# Altium PCB vaja2.PcbDoc
Units mm, origin at the board's own origin, x right, y up, seen from the top; angles counter-clockwise.
Board outline 22 x 14 mm, 2 copper layers (Top Layer, Bottom Layer); 10 components, 6 nets, 23 pads, 8 vias.
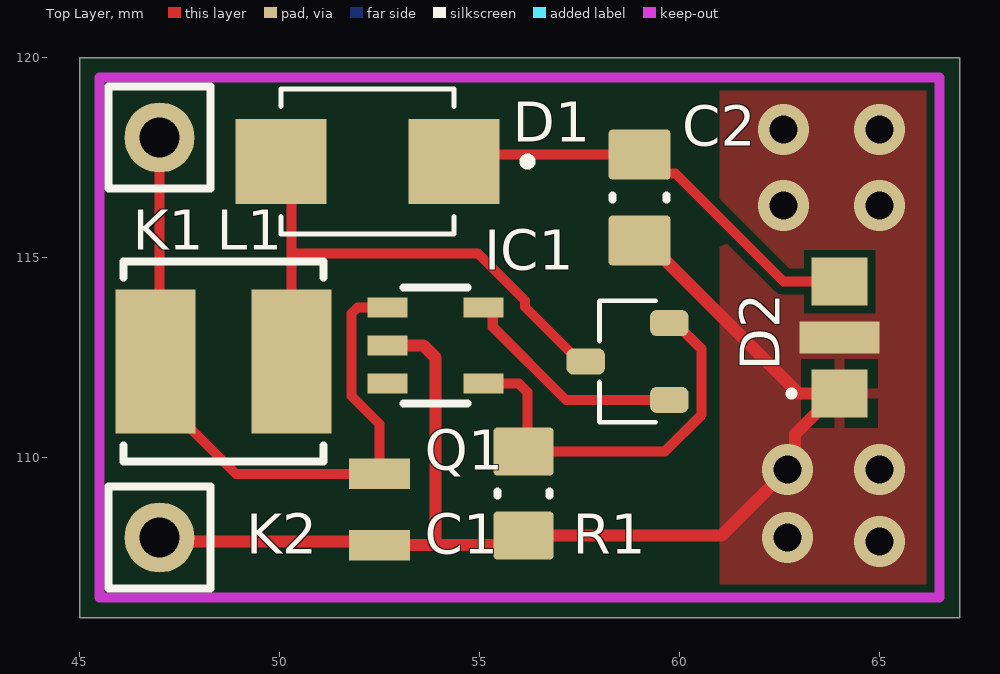
[diagram p0: Top Layer view]
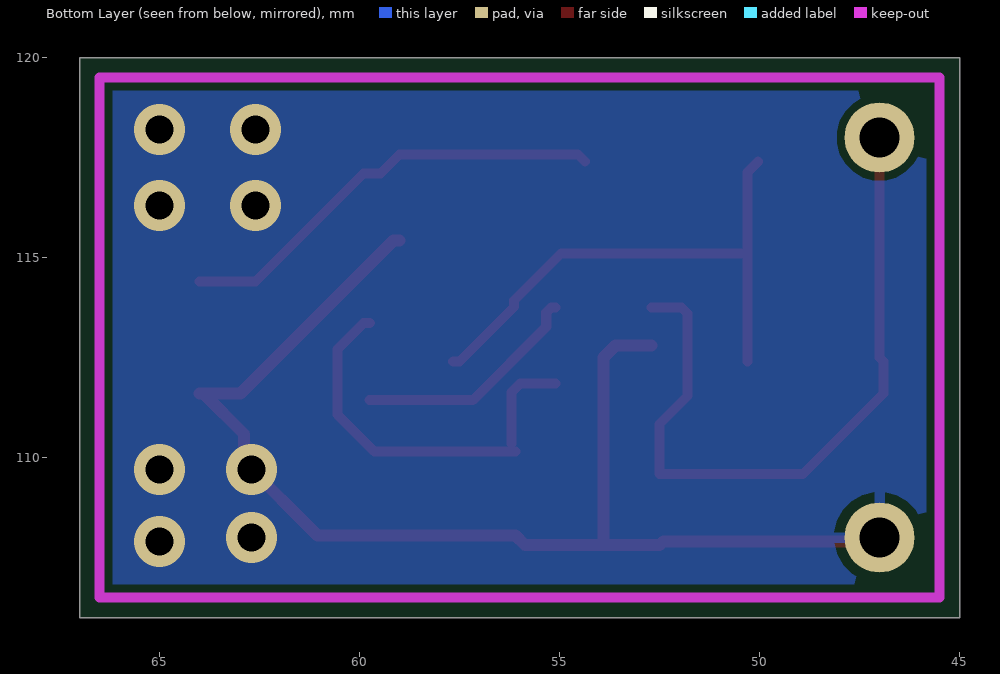
[diagram p1: Bottom Layer view, seen from below]
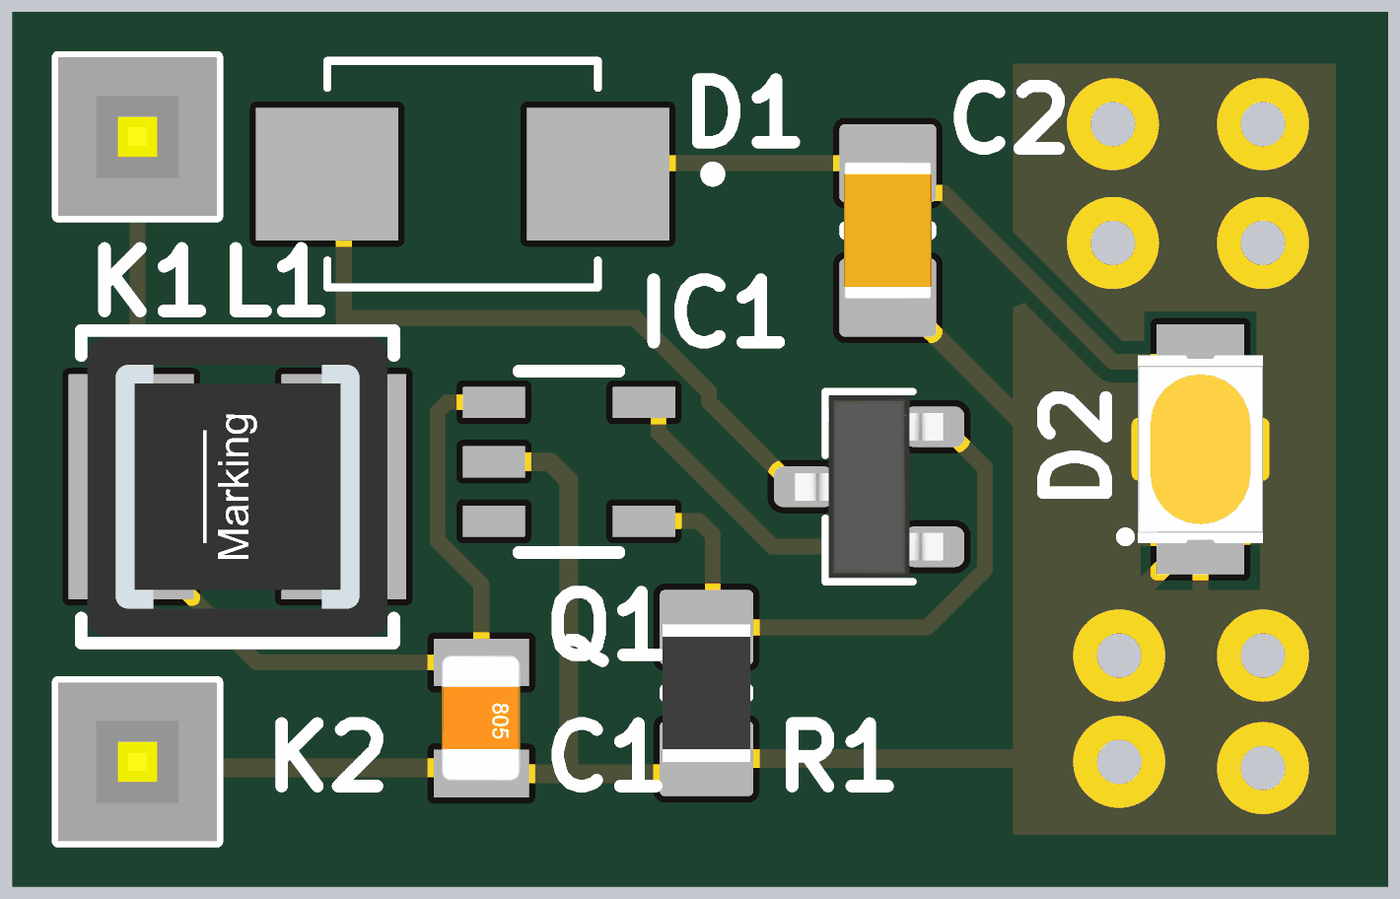
[diagram p2: 3D render of the assembled board from above, using the file's embedded part models]

## Layer stack, top to bottom
Top Solder: solder mask 0.0102, Solder Resist, Dk 3.5
Top Layer: signal copper 0.0356
Dielectric 1: dielectric 0.32, FR-4, Dk 4.8
Bottom Layer: signal copper 0.0356
Bottom Solder: solder mask 0.0102, Solder Resist, Dk 3.5

## Board outline
45,106 67,106 67,120 45,120

## Design rules (kind name [scope] priority, off if disabled: settings)
Clearance [All] p1: gap=0.2 ignorepadtopadclearanceinfootprint=FALSE
HoleSize [All] p1: absolutevalues=TRUE maxlimit=5 minlimit=0.3 maxpercent=80.000 minpercent=20.000
MinimumSolderMaskSliver [All] p1: minsoldermaskwidth=0.1
PolygonConnect [All] p1: thpad.connectstyle=Relief thpad.reliefconductorwidth=0.254 thpad.reliefentries=4 thpad.polygonreliefangle="90 Angle" thpad.airgapwidth=0.254 smdpad.connectstyle=Relief smdpad.reliefconductorwidth=0.254 smdpad.reliefentries=4 smdpad.polygonreliefangle="90 Angle" smdpad.airgapwidth=0.254 via.connectstyle=Direct via.reliefconductorwidth=0.254 via.reliefentries=4 via.polygonreliefangle="90 Angle" via.airgapwidth=0.254
RoutingVias [All] p1: holewidth=0.4 width=1.8 viastyle="Through Hole" minholewidth=0.3 minwidth=0.7 maxholewidth=0.7 maxwidth=1
SilkToSilkClearance [All] p1: silktosilkclearance=0.1
SilkToSolderMaskClearance [IsPad] p1: minsilkscreentomaskgap=0.01 clearancetoexposedcopper=TRUE
SolderMaskExpansion [All] p1: expansion=0.102 istentingtop=FALSE
SupplyNets "Schematic Supply Nets" [InNet('GND')] p1: voltage=0.000
Width [All] p1: maxlimit=1 minlimit=0.2 preferedwidth=0.3
26 further rules are at their usual default settings.

## Components (designator, comment, footprint, x,y, rotation, side; value= is the part's Value field where it differs from the comment)
C1 "" C0805 52.5,108.7 r270 top value=100nF
C2 "2.2 uF" C0805(2012)_M 59,116.5 r270 top
D1 "SK14B" DIOM4336X265N 52.2,117.4 r180 top
D2 "158302250" WL-SWTP_3022_L3W2H0.8 64,113 r90 top locked
IC1 "ZXSC300" SOT23-5 53.9,112.8 r270 top
K1 "H1x1" H1x1 47,118 r0 top
K2 "H1x1" H1x1 47,108 r0 top
L1 "74406042101" WE-LQFS_4818 48.6,112.4 r90 top
Q1 "PBSS4120T" SOT23-3_N 58.7,112.4 r90 top
R1 "0.13R" R0805(2012)_M 56.1,109.1 r270 top

## Footprints (in the part's own frame and the unit in brackets; to place one, negate y for a bottom-side part, rotate by r counter-clockwise, add the part's x,y. Pads: shape width x height; smd on the part's side, far side on the other; paste and mask are expansions set on the pad)
C0805 [mil]
  rect 30x60 smd: 1(-35,0) 2(35,0)
  body extent -39,-25 39,24, height 31
C0805(2012)_M [mm]
  rrect15% 1.25x1.55 smd: 1(-1.075,0) 2(1.075,0)
  silkscreen extent -0.05,-0.67 0.05,0.67, body extent -1.1,-0.7 1.1,0.7, height 1.4
DIOM4336X265N [mm]
  rect 2.28x2.12 smd: A(2.165,0) C(-2.165,0)
  silkscreen extent -4.1,-1.81 2.16,1.81
H1x1 [mm]
  round 1.75 hole 1: 1(0,0)
  silkscreen extent -1.27,-1.27 1.27,1.27, body extent -1.27,-1.27 1.27,1.27, height 8.4
R0805(2012)_M [mm]
  rrect15% 1.2x1.5 smd: 1(-1.05,0) 2(1.05,0)
  silkscreen extent -0.05,-0.65 0.05,0.65, body extent -1.1,-0.7 1.1,0.7, height 0.8
SOT23-3_N [mm] "Small Outline Transistor (SOT23), 0.96 mm pitch; 3 pin, 2.92 mm L X 1.30 mm W X 1.12 mm H body"
  rrect49% 0.65x0.96 smd: 1(-0.96,-1.045) 2(0.96,-1.045) 3(0,1.045)
  silkscreen extent -1.52,-0.7 1.52,0.7, body extent -1.46,-1.18 1.46,1.18, height 1.12
SOT23-5 [mm]
  rect 0.5x1 smd: 1(-0.95,-1.2) 2(0,-1.2) 3(0.95,-1.2) 4(0.95,1.2) 5(-0.95,1.2)
  silkscreen extent -1.45,-0.8 1.45,0.8
WE-LQFS_4818 [mm] "SMT Power Inductor, body 4.8x4.8mm"
  rect 3.6x2 smd: 1(0,1.7) 2(0,-1.7)
  silkscreen extent -2.5,-2.5 2.5,2.5, body extent -2.4,-2.4 2.4,2.4, height 1.8
WL-SWTP_3022_L3W2H0.8 [mm] "SMD White Top view PLCC, body 3x2.1mm"
  rect 1.2x1.4 smd: 1(-1.4,0) 2(1.4,0)
  rect 0.8x2 smd: TP(0,0)
  silkscreen extent -1.47,1.12 -1.33,1.27, body extent -1.5,-1 1.5,1, height 0.8

## Part data
C1: library part CMP-085-000000-1, "Capacitor", Component Type=Standard, Design Item ID=C, Pin Count=2, Source="Battery charger.SCHLIB"
C2: library part CMP-031-000008-1, "Capacitor", Component Type=Standard, Design Item ID=C, Pin Count=2, Source=MISKO.SCHLIB
D1: library part CMP-103-000087-1, Case/Package=None, Availability=Unavailable, Component Type=Standard, Design Item ID=SK14B, MP=SK14B, Pin Count=2, Price=None, Source=SK14B.SchLib
D2: library part CMP-022-000013-1, "WL-SWTP SMT White Top view PLCC, size 3022, Daylight, 3.2V, 120°", Case/Size Code=3022, Color Rendering Index=85, Correlated Color Temperature=5000K, Emitting Color=Daylight, Forward Voltage=3.2V, Manufacturer="Wurth Elektronik", Operating Temperature Max=85°C, Operating Temperature Min=-40°C, Category="General Lighting", Chip Technology=InGaN, Component Type=Standard, ComponentLink1Description="Website Link", ComponentLink1URL=https://www.we-online.com/redexpert/article/158302250?ad, ComponentLink2Description="Datasheet Link", ComponentLink2URL=https://www.we-online.com/redexpert/spec/158302250?ad, Design Item ID=158302250, Height=0.8mm, Length=3mm, Luminous Flux=22lm, Manufacturer Part Number=158302250, Match Code=WL-SWTP, Mount="Surface Mount", Packaging="Tape and Reel", Pin Count=2, Source=WL-SWTP.SchLib, Viewing Angle=120°, Width=2mm
IC1: library part CMP-026-000242-1, "LED Driver 1 Segment 4000uA Supply Current 5-Pin SOT-23 T/R", Package=None, Check_prices=https://www.snapeda.com/parts/ZXSC300/Zetex/view-part/?ref=eda, Component Type=Standard, Design Item ID=ZXSC300, MF="Diodes Zetex", MP=ZXSC300, Pin Count=4, SnapEDA_Link=https://www.snapeda.com/parts/ZXSC300/Zetex/view-part/?ref=snap, Source=ZXSC300.SchLib
K1 K2: library part CMP-113-000000-1, "Header 1x1 (male)", Component Type=Standard, Design Item ID=H1x1, Pin Count=1, Source=Kon_Tipk.SchLib
L1: library part CMP-010-000050-1, "WE-LQFS SMT Power Inductor, size 4818, 100µH, 0.42A, 1386mO", Case/Size Code=4818, DC Resistance=1155mO, DC Resistance Max=1386mO, Inductance=100µH, Manufacturer="Wurth Elektronik", Operating Temperature Max=125°C, Operating Temperature Min=-40°C, Rated Current=0.42A, Saturation Current=0.32A, Self Resonant Frequency=15MHz, Category="Shielded Power Inductors", Component Type=Standard, ComponentLink1Description="Website Link", ComponentLink1URL=https://www.we-online.com/redexpert/article/74406042101?ad, ComponentLink2Description="Datasheet Link", ComponentLink2URL=https://www.we-online.com/redexpert/spec/74406042101?ad, Design Item ID=74406042101, Height=1.8mm, Length=4.8mm, Manufacturer Part Number=74406042101, Match Code=WE-LQFS, Mount="Surface Mount", Packaging="Tape and Reel", Pin Count=2, Source=WE-LQFS.SchLib, Width=4.8mm
Q1: library part CMP-018-000001-1, Design Item ID="Transistor BJT NPN", Source="generic library.SchLib"
R1: library part CMP-036-000000-1, "R", Component Type=Standard, Design Item ID=R, Pin Count=2, Source=MISKO.SCHLIB

## Via types
v1: diameter 1.27, hole 0.711, Top Layer to Bottom Layer, 8 vias

## Nets (pads, with @x,y where several pads share a name; then routed paths per layer and width w, separated by ;. In a path a pad name is that pad's centre, name@x,y a point inside that pad or via, vN(x,y) a via of type N, cw(c..) or ccw(c..) an arc to the next point about the centre after c; other vN are vias at no path point)
GND: C1.2 C2.2 D2.1 D2.TP IC1.2 K2.1 R1.2 | length 31.6
  Top Layer w0.3: K2.1 47.094,107.906 52.405,107.906 C1.2 53.9,107.811 ; IC1.2 53.6,112.8 53.699,112.701 53.9,112.5 53.9,107.811 ; C2.2 59.15,115.425 62.975,111.6 D2.1 ; D2.1@63.9,111.6 62.886,110.586 62.886,109.886 61.05,108.05 R1.2 55.861,107.811 53.9,107.811
  other v1: 65,107.9 62.7,108 62.7,109.7 65,109.7 62.6,116.3 65,116.3 62.6,118.2 65,118.2
NetC1_1: C1.1 IC1.1 K1.1 L1.1 | length 18.1
  Top Layer w0.254: K1.1 47,112.5 L1.1 46.9,111.6 48.911,109.589 C1.1 52.5,110.838 51.801,111.536 51.801,113.601 51.95,113.75 IC1.1
NetC2_1: C2.1 D1.C D2.2 | length 11
  Top Layer w0.254: D1.C 54.54,117.575 C2.1 59.475,117.1 59.9,117.1 62.6,114.4 D2.2
NetD1_A: D1.A L1.2 Q1.3 | length 13.7
  Top Layer w0.254: D1.A 50.3,117.135 50.3,115.1 ; L1.2 50.3,115.1 ; Q1.3 57.5,112.4 56.138,113.762 56.138,113.925 54.962,115.1 50.3,115.1
NetIC1_4: IC1.4 Q1.2 R1.1 | length 10
  Top Layer w0.254: IC1.4 55.981,111.85 56.2,111.631 R1.1@56.2,110.35 ; R1.1 59.629,110.15 60.552,111.073 60.552,112.708 59.9,113.36 Q1.2
NetIC1_5: IC1.5 Q1.1 | length 5.8
  Top Layer w0.254: IC1.5 55.209,113.75 55.332,113.627 55.332,113.268 57.16,111.44 Q1.1
pads on no net: IC1.3

## Polygon pours and split planes (outlines as drawn)
GND on Bottom Layer "GND_L02_P002" (solid, remove dead copper, pour order 2): 45.5,119.5 66.5,119.5 66.5,106.5 45.5,106.5
GND on Top Layer "GND_L01_P000" (solid, remove dead copper, pour order 0): 61,119.5 66.5,119.5 66.5,106.5 61,106.5

## Keep-outs
Keep-Out Layer:
  lines w0.254: 45.5,106.5 45.5,119.5 66.5,119.5 66.5,106.5 45.5,106.5

## Silkscreen, mask and mechanical layers (free items; w line width, h text height)
Mechanical 1:
  the board outline again, w0.254